# Altium PCB 2022-7-14-iic-2.42oled_2022-07-30.pcbdoc
Units mil, origin at the board's own origin, x right, y up, seen from the top; angles counter-clockwise.
Board outline 3795.27 x 2925.19 mil, 2 copper layers (Top Layer, Bottom Layer); 25 components, 16 nets, 93 pads, 84 vias.
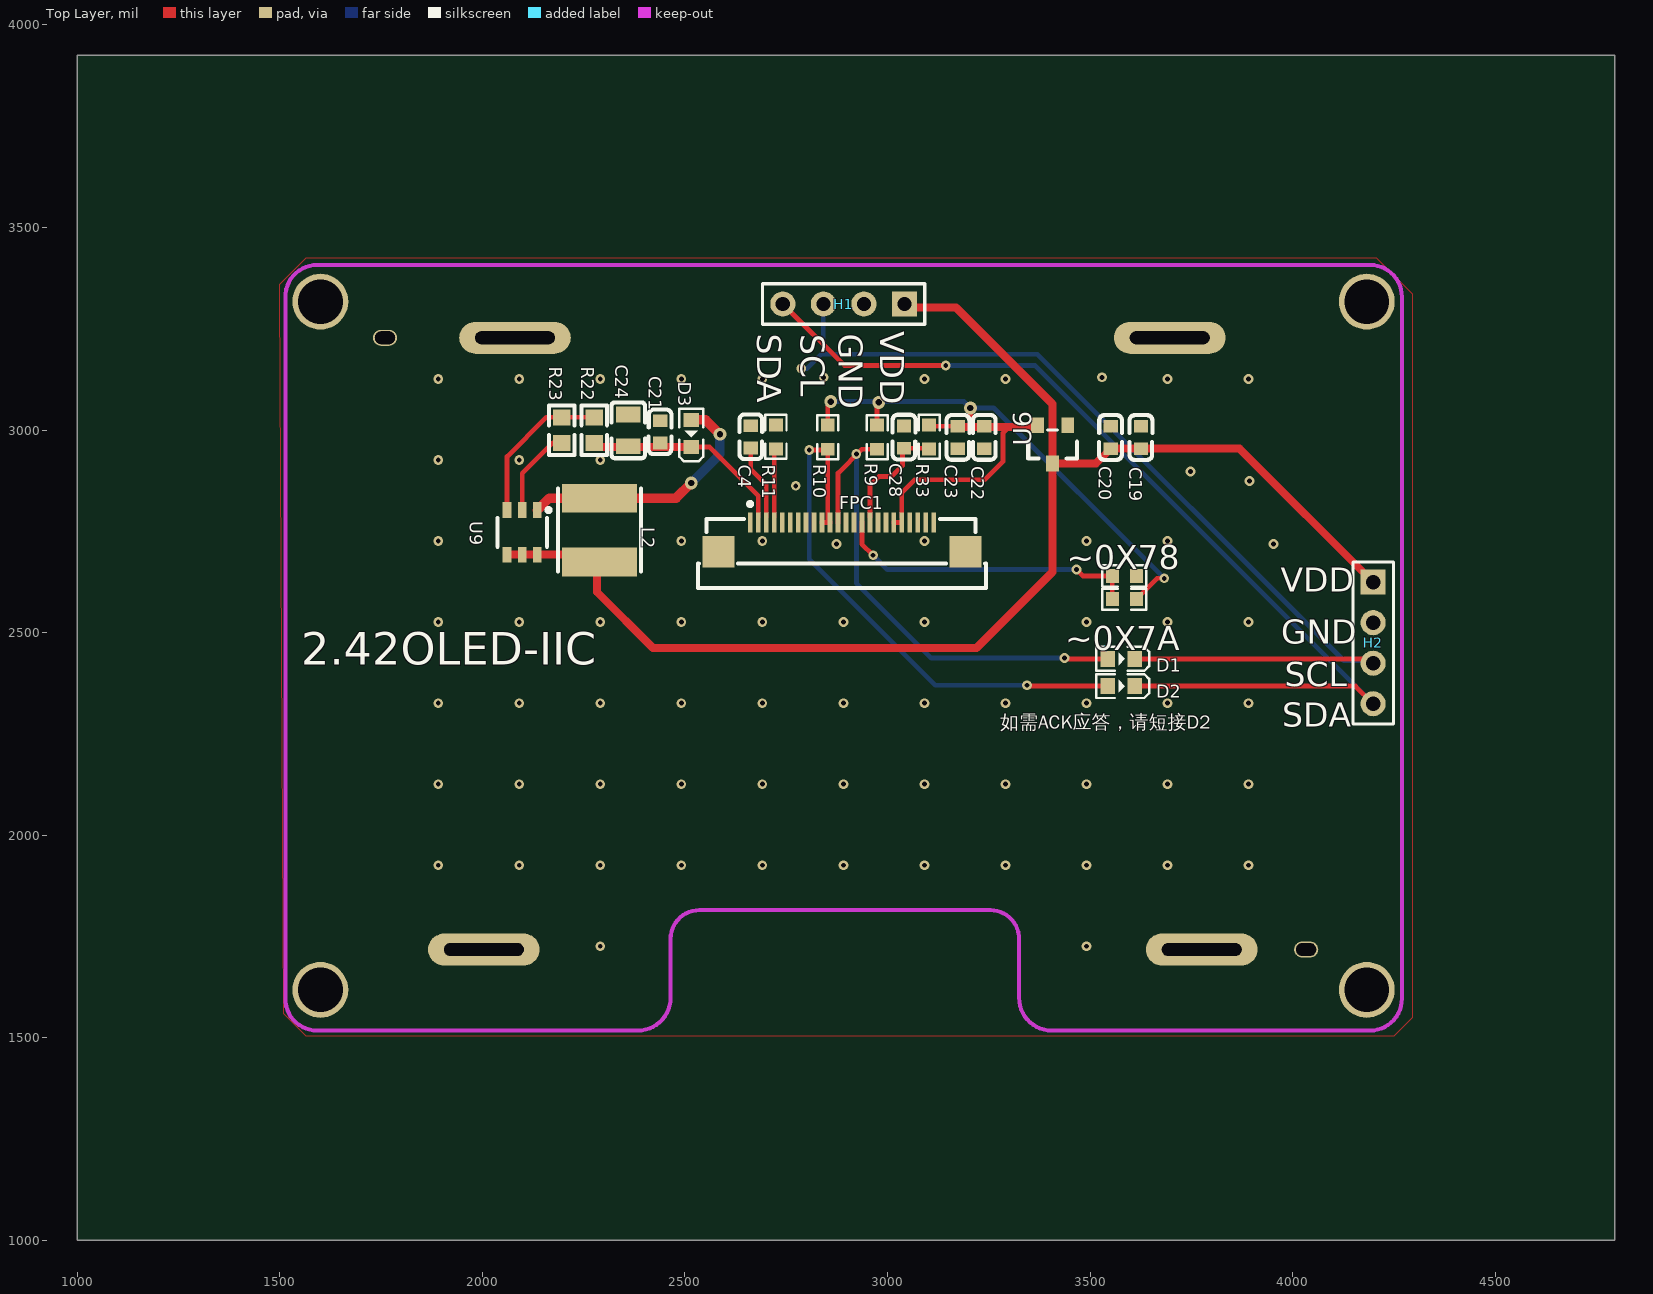
[diagram p0: Top Layer view]
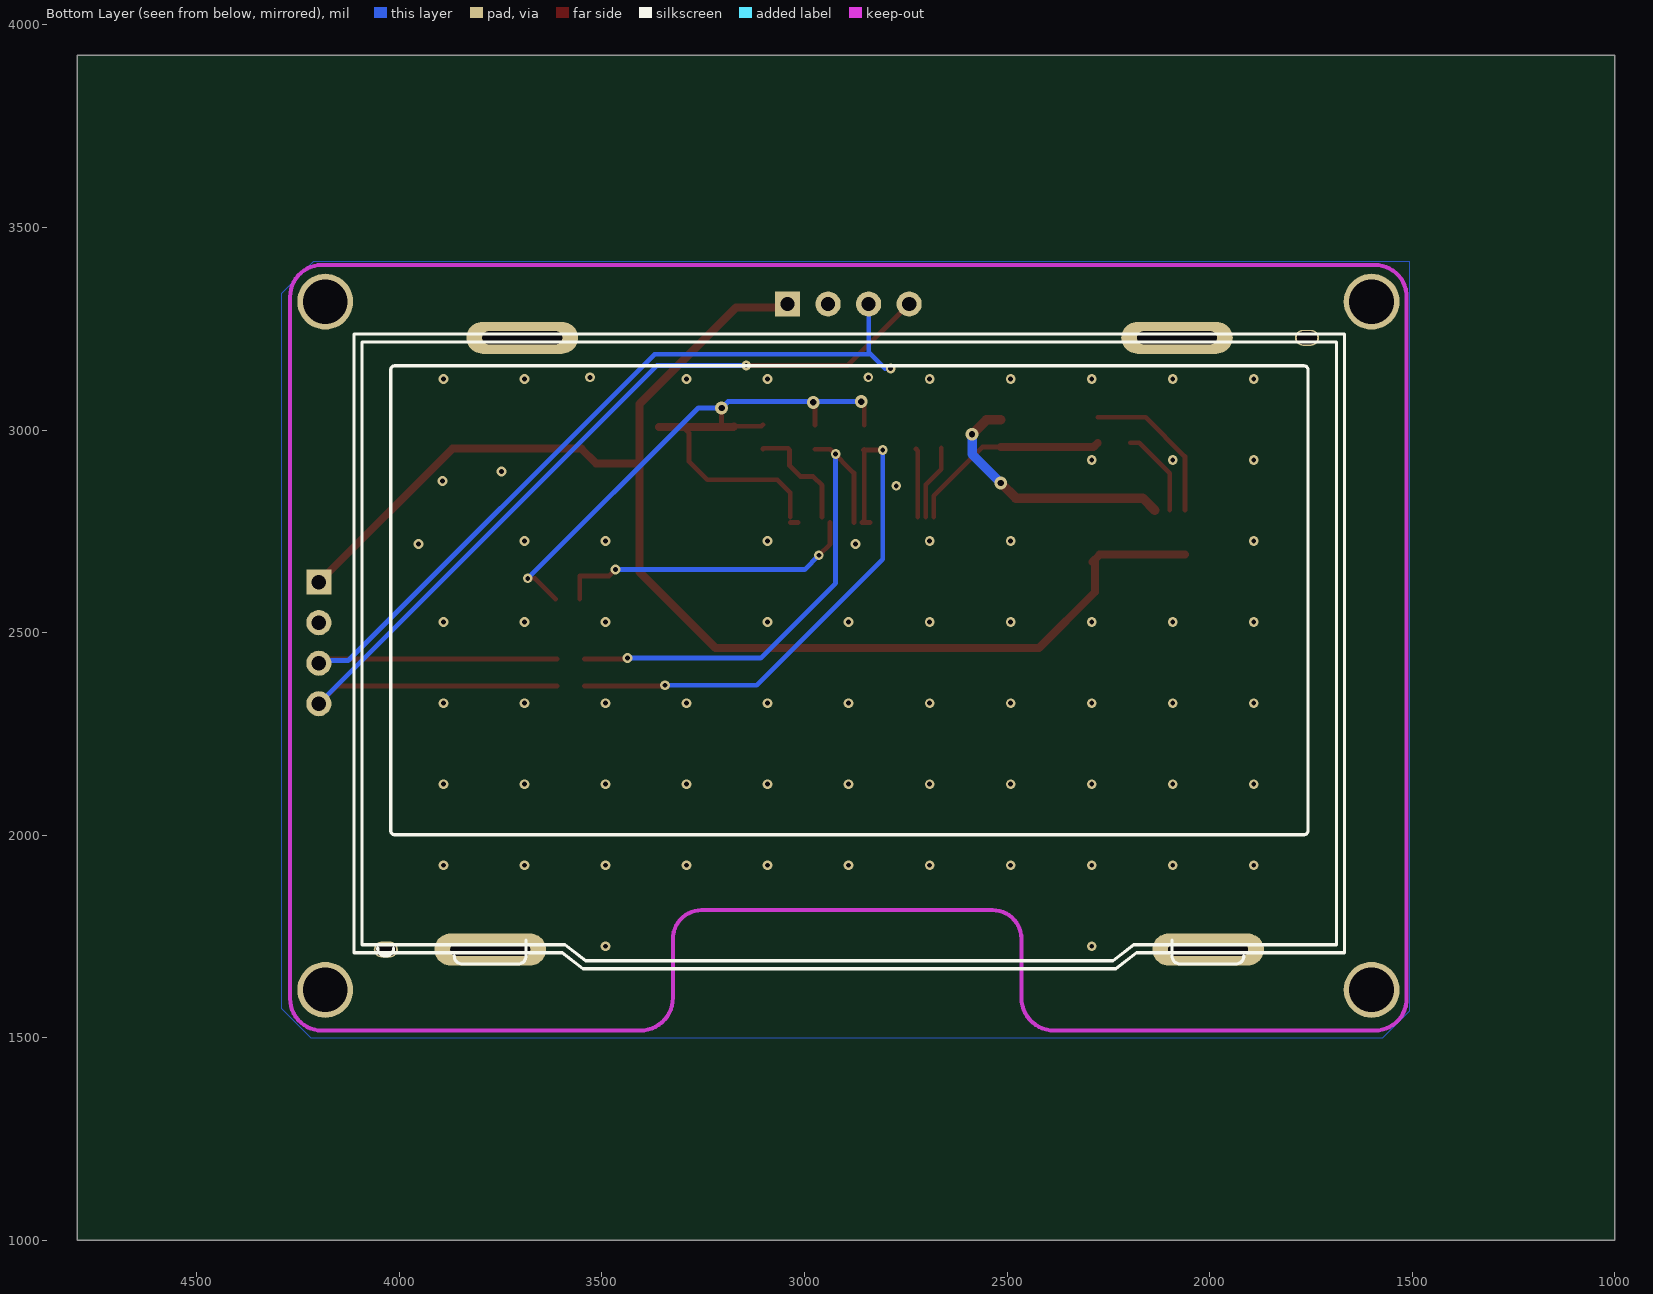
[diagram p1: Bottom Layer view, seen from below]

## Layer stack, top to bottom
Top Solder: solder mask 0.4, Solder Resist, Dk 3.5
Top Layer: signal copper 1.4
Dielectric1: dielectric 12.6, FR-4, Dk 4.8
Bottom Layer: signal copper 1.4
Bottom Solder: solder mask 0.4, Solder Resist, Dk 3.5

## Board outline
4795.27,1000 1000,1000 1000,3925.19 4795.27,3925.19

## Design rules (kind name [scope] priority, off if disabled: settings)
Clearance [All] p1: gap=10 ignorepadtopadclearanceinfootprint=FALSE
PolygonConnect [All] p1: connectstyle=Relief reliefconductorwidth=10 reliefentries=4 polygonreliefangle="90 Angle" airgapwidth=10
RoutingVias [All] p1: holewidth=28 width=50 viastyle="Through Hole" minholewidth=28 minwidth=50 maxholewidth=28 maxwidth=50
SolderMaskExpansion [All] p1: expansion=4 istentingtop=FALSE
Width [All] p1: maxlimit=10 minlimit=10 preferedwidth=10
30 further rules are at their usual default settings.

## Components (designator, comment, footprint, x,y, rotation, side; value= is the part's Value field where it differs from the comment)
C4 "4.7u/25v" C0603 2662.73,2983.11 r270 top
C19 "10uf/10v" C0603 3625.91,2981.53 r90 top
C20 "104" C0603 3550.91,2981.53 r90 top
C21 "104" C0603 2438.91,2995.31 r90 top
C22 "104" C0603 3238.55,2981.59 r270 top
C23 "22uf/10v" C0603 3173.55,2981.59 r270 top
C24 "22uf/25v" C0805 2360.17,2999.25 r270 top
C28 "104" C0603 3040.62,2982.31 r270 top
D1 "1n5819" D0603-RD 3576.77,2435.04 r180 top
D2 "1n5819" D0603-RD 3576.77,2368.11 r180 top
D3 "1n5819" D0603-RD 2515.68,2991.37 r90 top
FPC1 "2.42-SSD1309" FPC-SMD_FPC05024-REVERSE 2887.8,2735.49 r0 top
H1 "HDR-F-2.54_1x4" HDR-F-2.54_1X4 2891.73,3311.02 r180 top
H2 "HDR-F-2.54_1x4" HDR-F-2.54_1X4 4198.81,2474.41 r270 top
L2 "4.7uH" IND-SMD_L5.0-W5.0 2289.3,2753.18 r270 top
R9 "10k" R0603#1 2974.41,2982.28 r270 top
R10 "10k" R0603#1 2852.36,2982.28 r270 top
R11 "910k" R0603#1 2724.83,2983.11 r270 top
R22 "191k/1%" R0603#2 2276.27,2999.88 r90 top
R23 "10k/1%" R0603#2 2196.27,2999.88 r270 top
R33 "10k" R0603#1 3102.73,2983.11 r90 top
U6 "XC6206-3.3V" SSOT-3_L2.9-W1.6-P0.95-LS2.8-BR 3407.48,2964.56 r90 top
U9 "SX1308" SOT-23-6_L2.9-W1.6-P0.95-LS2.8-BR 2098.36,2747.28 r90 top
~0X7A "NC" R0603#1 3584.64,2582.68 r180 top
~0X78 "1k" R0603#1 3584.64,2639.76 r180 top

## Footprints (in the part's own frame and the unit in brackets; to place one, negate y for a bottom-side part, rotate by r counter-clockwise, add the part's x,y. Pads: shape width x height; smd on the part's side, far side on the other; paste and mask are expansions set on the pad)
C0603 [mm]
  rect 0.8x0.9 smd: 1(-0.7,0) 2(0.7,0)
  silkscreen extent -1.41,-0.71 1.39,0.72
C0805 [mm]
  rect 1x1.55 smd: 1(-1,0) 2(1,0)
  silkscreen extent -1.75,-1.04 1.75,1.04
D0603-RD [mm]
  rect 0.9x1 smd: 1(-0.85,0) 2(0.85,0)
  silkscreen extent -1.75,-0.75 1.55,0.75
FPC-SMD_FPC05024-REVERSE [mm]
  rect 0.3x1.25 smd: 1(5.75,0.913) 2(5.25,0.913) 3(4.75,0.913) 4(4.25,0.913) 5(3.75,0.913) 6(3.25,0.913) 7(2.75,0.913) 8(2.25,0.913) 9(1.75,0.913) 10(1.25,0.913) 11(0.75,0.913) 12(0.25,0.913) 13(-0.25,0.913) 14(-0.75,0.913) 15(-1.25,0.913) 16(-1.75,0.913) 17(-2.25,0.913) 18(-2.75,0.913) 19(-3.25,0.913) 20(-3.75,0.913) 21(-4.25,0.913) 22(-4.75,0.913) 23(-5.25,0.913) 24(-5.75,0.913)
  rect 2x2 smd: 25(7.75,-0.913) 26(-7.75,-0.913)
  silkscreen extent -9.02,-3.17 9.02,2.21
HDR-F-2.54_1X4 [mil]
  rect 62x62 hole 35: 1(-150,0)
  round 62 hole 35: 2(-50,0) 3(50,0) 4(150,0)
  silkscreen extent -200,-50 200,50
IND-SMD_L5.0-W5.0 [mm]
  rect 1.8x4.7 smd: 1(-2,0) 2(2,0)
  silkscreen extent -2.6,-2.6 2.6,2.6
R0603#1 [mil]
  rect 31.75x34.02 smd: 1(-29.66,0) 2(29.65,0)
  silkscreen extent -55,-26 55,26
R0603#2 [mil]
  rect 39.37x43.31 smd: 1(-31.49,0) 2(31.49,0)
  silkscreen extent -61,-31 61,32
SOT-23-6_L2.9-W1.6-P0.95-LS2.8-BR [mm]
  rect 1x0.55 smd: 1(1.4,-0.95) 2(1.4,0) 3(1.4,0.95) 4(-1.4,0.95) 5(-1.4,0) 6(-1.4,-0.95)
  silkscreen extent -0.9,-1.78 1.52,1.55
SSOT-3_L2.9-W1.6-P0.95-LS2.8-BR [mm]
  rect 1x0.8 smd: 1(1.2,-0.95) 2(1.2,0.95) 3(-1.2,0)
  silkscreen extent -0.89,-1.52 0.9,1.52

## Free pads (board coordinates)
  oval 60x39.37 hole 31.5 slot 49.61 at 0 deg: 2(1759.8,3227.58) 2(4033.39,1717.75)
  oval 275.59x78.74 hole 31.5 slot 196.85 at 0 deg: 3(2003.91,1717.74) 3(2080.64,3227.59) 3(3696.79,3227.59)
  oval 275.59x78.74 hole 31.5 slot 196.84 at 0 deg: 3(3775.53,1717.73)
  round 137.79 hole 110.24: 4(1600.39,3316.93) 4(1600.39,1618.11) 4(4183.06,1618.11) 4(4183.06,3316.93)

## Via types
v1: diameter 24.02, hole 12.01, Top Layer to Bottom Layer, 70 vias
v2: diameter 24, hole 12, Top Layer to Bottom Layer, 9 vias
v3: diameter 31.5, hole 15.75, Top Layer to Bottom Layer, 5 vias

## Nets (pads, with @x,y where several pads share a name; then routed paths per layer and width w, separated by ;. In a path a pad name is that pad's centre, name@x,y a point inside that pad or via, vN(x,y) a via of type N, cw(c..) or ccw(c..) an arc to the next point about the centre after c; other vN are vias at no path point)
12V: C21.1 C24.2 D3.1 FPC1.23 R22.1 | length 511.4
  Top Layer w11.81: D3.1 2560.95,2957.91 2681.05,2837.81 FPC1.23@2681.05,2785.31
  Top Layer w19.68: R22.1 2286.74,2957.91 D3.1
+3.3V: C22.1 C23.1 FPC1.5 FPC1.6 R9.1 R10.1 R33.2 U6.2 ~0X7A.1 | length 1971.6
  Top Layer w11.81: R10.1 2852.37,3062.31 v3(2860.17,3070.11) ; R9.1 2974.41,3063.83 v3(2978.73,3068.15) ; FPC1.6@3015.75,2771.42 FPC1.5 ; FPC1.5@3035.35,2785.31 3035.35,2845.69 3066.86,2877.2 3240.09,2877.2 3285.36,2922.47 3285.36,2993.08 3299.28,3007 ; R33.2 3106.35,3009.15 C23.1 ; 3204.66,3007 v3(3204.66,3054.37) ; ~0X7A.1 3665.48,2633.86 v2(3683.07,2633.86)
  Top Layer w19.68: C23.1 3175.7,3007 U6.2@3359.38,3007
  Bottom Layer w11.81: v3(2860.17,3070.11) 3188.91,3070.11 v3(3204.66,3054.37) 3262.56,3054.37 v2(3683.07,2633.86)
+5V: C19.1 C20.1 H1.1 H2.1 L2.2 U6.3 U9.4 U9.5 U9.6 | length 3401.4
  Top Layer w19.68: U9.4 2271.59,2692.16 L2.2@2289.3,2674.44 ; L2.2@2289.33,2674.41 2283.43,2674.41 2283.43,2599.61 2421.23,2461.81 3219.73,2461.81 3407.53,2649.61 U6.3 ; H1.1@3037.73,3302.41 3169.23,3302.41 3407.53,3064.11 U6.3 ; C20.1 C19.1 ; C20.1 3514.23,2917.31 U6.3 ; C19.1 3869.22,2954.01 H2.1
FB: R22.2 R23.1 U9.3 | length 387.4
  Top Layer w11.81: U9.3 2060.96,2934.28 2158.04,3031.37 R23.1 R22.2
FPC1_10: FPC1.10 ~0X7A.2 ~0X78.2 | length 760.6
  Top Layer w11.81: FPC1.10 2937.01,2718.5 v2(2964.57,2690.95) ; v2(3466.54,2655.51) 3482.28,2639.76 ~0X78.2 ~0X7A.2
  Bottom Layer w11.81: v2(2964.57,2690.95) 3000,2655.51 v2(3466.54,2655.51)
FPC1_21: FPC1.21 R11.2 | length 170
  Top Layer w11.81: FPC1.21@2720.35,2785.31 2720.35,2948.97 R11.2@2724.83,2953.45
FPC1_22: C4.2 FPC1.22 | length 186
  Top Layer w11.81: C4.2@2662.73,2955.55 2662.73,2903.38 2700.75,2865.36 FPC1.22@2700.75,2785.31
GND: C4.1 C19.2 C20.2 C21.2 C22.2 C23.2 C24.1 C28.1 FPC1.1 FPC1.2 FPC1.3 FPC1.7 FPC1.8 FPC1.11 FPC1.12 FPC1.24 FPC1.25 FPC1.26 H1.2 H2.2 pad.3 pad.4 R11.1 R23.2 U6.1 U9.2 ~0X78.1 | length 219.7
  Top Layer w11.81: U9.2 2098.36,2892.95 2173.79,2968.38 R23.2
  other v1: 2291.2,1725.91 3491.19,1725.91 1891.2,1925.91 2091.2,1925.91 2291.2,1925.91 2491.2,1925.91 2691.2,1925.91 2891.19,1925.91 3091.19,1925.91 3291.19,1925.91 3491.19,1925.91 3691.19,1925.91 3891.19,1925.91 1891.2,2125.9 2091.2,2125.9 2291.2,2125.9 2491.2,2125.9 2691.2,2125.9 2891.19,2125.9 3091.19,2125.9 3291.19,2125.9 3491.19,2125.9 3691.19,2125.9 3891.19,2125.9 1891.2,2325.9 2091.2,2325.9 2291.2,2325.9 2491.2,2325.9 2691.2,2325.9 2891.19,2325.9 3091.19,2325.9 3291.19,2325.9 3491.19,2325.9 3691.19,2325.9 3891.19,2325.9 1891.2,2525.9 2091.2,2525.9 2291.2,2525.9 2491.2,2525.9 2691.2,2525.9 2891.19,2525.9 3091.19,2525.9 3491.19,2525.9 3691.19,2525.9 3891.19,2525.9 2874.02,2718.5 3952.75,2718.5 1891.2,2725.9 2491.2,2725.9 2691.2,2725.9 3091.19,2725.9 3491.19,2725.9 3691.19,2725.9 2773.62,2862.21 3893.7,2874.02 3748.03,2897.64 1891.2,2925.9 2091.2,2925.9 2291.2,2925.9 1891.2,3125.9 2091.2,3125.9 2291.2,3125.9 2491.2,3125.9 2691.2,3125.9 3091.19,3125.9 3291.19,3125.9 3691.19,3125.9 3891.19,3125.9 2842.52,3129.92 3529.53,3129.92
H1_3: D1.1 H1.3 H2.3 | length 2524.9
  Top Layer w11.81: D1.1 4188.18,2435.04 H2.3
  Bottom Layer w11.81: v2(2787.4,3151.57) 2801.17,3151.57 2841.73,3192.12 H1.3 ; v2(2787.4,3151.57) 2801.13,3151.61 2836.63,3187.01 3370.03,3187.01 4126.03,2431.11 4192.13,2431.11 H2.3
H1_4: D2.1 H1.4 H2.4 | length 2472.5
  Top Layer w11.81: H1.4 2893.3,3159.45 v2(3143.7,3159.45) ; D2.1 4155.11,2368.11 H2.4
  Bottom Layer w11.81: v2(3143.7,3159.45) 3363.78,3159.45 H2.4
L2_1: D3.2 L2.1 U9.1 | length 642.6
  Top Layer w23.62: U9.1 2165.28,2831.92 L2.1 2478.28,2831.92 v3(2515.68,2869.33) ; D3.2 2551.15,3024.81 v3(2586.55,2989.41)
  Bottom Layer w23.62: v3(2515.68,2869.33) 2586.55,2940.19 v3(2586.55,2989.41)
RST: C28.2 FPC1.9 R33.1 | length 285.3
  Top Layer w11.81: FPC1.9@2956.65,2785.31 2956.65,2863.45 2978.28,2885.07 3009.77,2885.07 3037.33,2912.63 3037.33,2951.46 3040.62,2954.75 3101.43,2954.75 R33.1@3102.73,2953.45
S$68: 
S$27221: 
SCL: D1.2 FPC1.13 R9.2 | length 1259.6
  Top Layer w11.81: FPC1.13@2877.93,2771.41 2877.93,2893.71 2936.93,2952.61 R9.2 ; v2(3437.01,2437.01) 3438.97,2435.04 D1.2
  Bottom Layer w11.81: v2(2923.23,2940.94) 2923.23,2622.05 3108.27,2437.01 v2(3437.01,2437.01)
SDA: D2.2 FPC1.14 FPC1.15 R10.2 | length 1387.3
  Top Layer w11.81: v2(2807.09,2950.79) R10.2@2854.33,2950.78 ; FPC1.15 FPC1.14 2852.36,2777.32 R10.2 ; v2(3344.49,2370.08) 3344.53,2368.11 D2.2
  Bottom Layer w11.81: v2(2807.09,2950.79) 2807.13,2681.11 3118.13,2370.11 v2(3344.49,2370.08)
pads on no net: FPC1.4 FPC1.16 FPC1.17 FPC1.18 FPC1.19 FPC1.20

## Polygon pours and split planes (outlines as drawn)
GND on Bottom Layer "Bottom Layer-GND" (solid, pour order 0): 1505.9,3415.35 4212.59,3415.35 4291.33,3336.61 4291.33,1572.84 4218.5,1500 1572.83,1500 1505.9,1566.93
GND on Top Layer "Top Layer-GND" (solid, pour order 1): 1500,3340.55 1500,3360.23 1564.96,3425.19 4206.69,3425.19 4295.27,3336.61 4295.27,1549.21 4249.99,1503.94 1564.96,1503.94 1509.84,1559.06

## Keep-outs
Keep-Out Layer:
  lines w10: 1513.78,1596.46 ccw(c1592.52,1596.46) 1592.52,1517.72 ; 1513.78,3328.74 cw(c1592.52,3328.74) 1592.52,3407.48 ; 2383.64,1517.7 ccw(c2383.64,1598.63) 2464.56,1598.63 ; 2464.56,1744.14 cw(c2535.43,1744.13) 2535.43,1815.01 ; 3253.93,1815.01 cw(c3253.93,1744.13) 3324.8,1744.13 ; 3324.8,1598.63 ccw(c3405.73,1598.63) 3405.73,1517.71 ; 4190.94,1517.72 ccw(c4190.94,1596.46) 4269.68,1596.46 ; 4190.94,3407.48 cw(c4190.94,3328.74) 4269.68,3328.74

## Silkscreen, mask and mechanical layers (free items; w line width, h text height)
Top Overlay:
  text "VDD" at 2982.28,3244.09 h59.05 r270
  text "SDA" at 2679.13,3238.19 h59.05 r270
  text "GND" at 2879.92,3238.19 h59.05 r270
  text "SCL" at 2785.43,3236.22 h59.05 r270
  text "VDD" at 3970.47,2600.39 h59.05
  text "GND" at 3972.44,2472.44 h59.05
  text "2.42OLED-IIC" at 1553.15,2420.63 h80
  text "SCL" at 3980.31,2368.11 h59.05
  text "SDA" at 3974.41,2267.72 h59.05
  text "如需ACK应答，请短接D2" at 3277.93,2250.56 h59.05
Bottom Overlay:
  lines w7.87: 1915.73,1701.68 ccw(c1935.41,1701.68) 1935.41,1681.99 2073.21,1681.99 ccw(c2073.21,1701.68) 2092.89,1701.68 2092.89,1741.05 ; 3687.38,1741.05 3687.38,1701.68 ccw(c3707.06,1701.68) 3707.06,1681.99 3844.86,1681.99 ccw(c3844.86,1701.68) 3864.54,1701.68 ; 4014.15,1721.36 ccw(c4033.83,1721.36) 4053.52,1721.36 ; 1666.91,1709.67 1666.91,3237.23 4111.79,3237.23 4111.79,1709.67 3598.01,1709.67 3546.83,1670.3 2231.87,1670.3 2180.69,1709.67 1666.91,1709.67 ; 1686.6,1729.36 1686.6,3217.55 4092.11,3217.55 4092.11,1729.36 3591.32,1729.36 3540.14,1689.99 2238.57,1689.99 2187.39,1729.36 1686.6,1729.36 ; 1757.46,2010.86 ccw(c1767.31,2010.86) 1767.31,2001.01 4011.4,2001.01 ccw(c4011.4,2010.86) 4021.24,2010.86 4021.24,3148.65 ccw(c4011.4,3148.65) 4011.4,3158.49 1767.31,3158.49 ccw(c1767.31,3148.65) 1757.46,3148.65 1757.46,2010.86